# Altium PCB MB525.PCBDOC (part 2 of 3)
Units mil, origin at the board's own origin, x right, y up, seen from the top; angles counter-clockwise.
Board outline 4505 x 6805 mil, 4 copper layers (TopLayer, GND, VCC, BottomLayer); 281 components, 230 nets, 1107 pads, 580 vias.
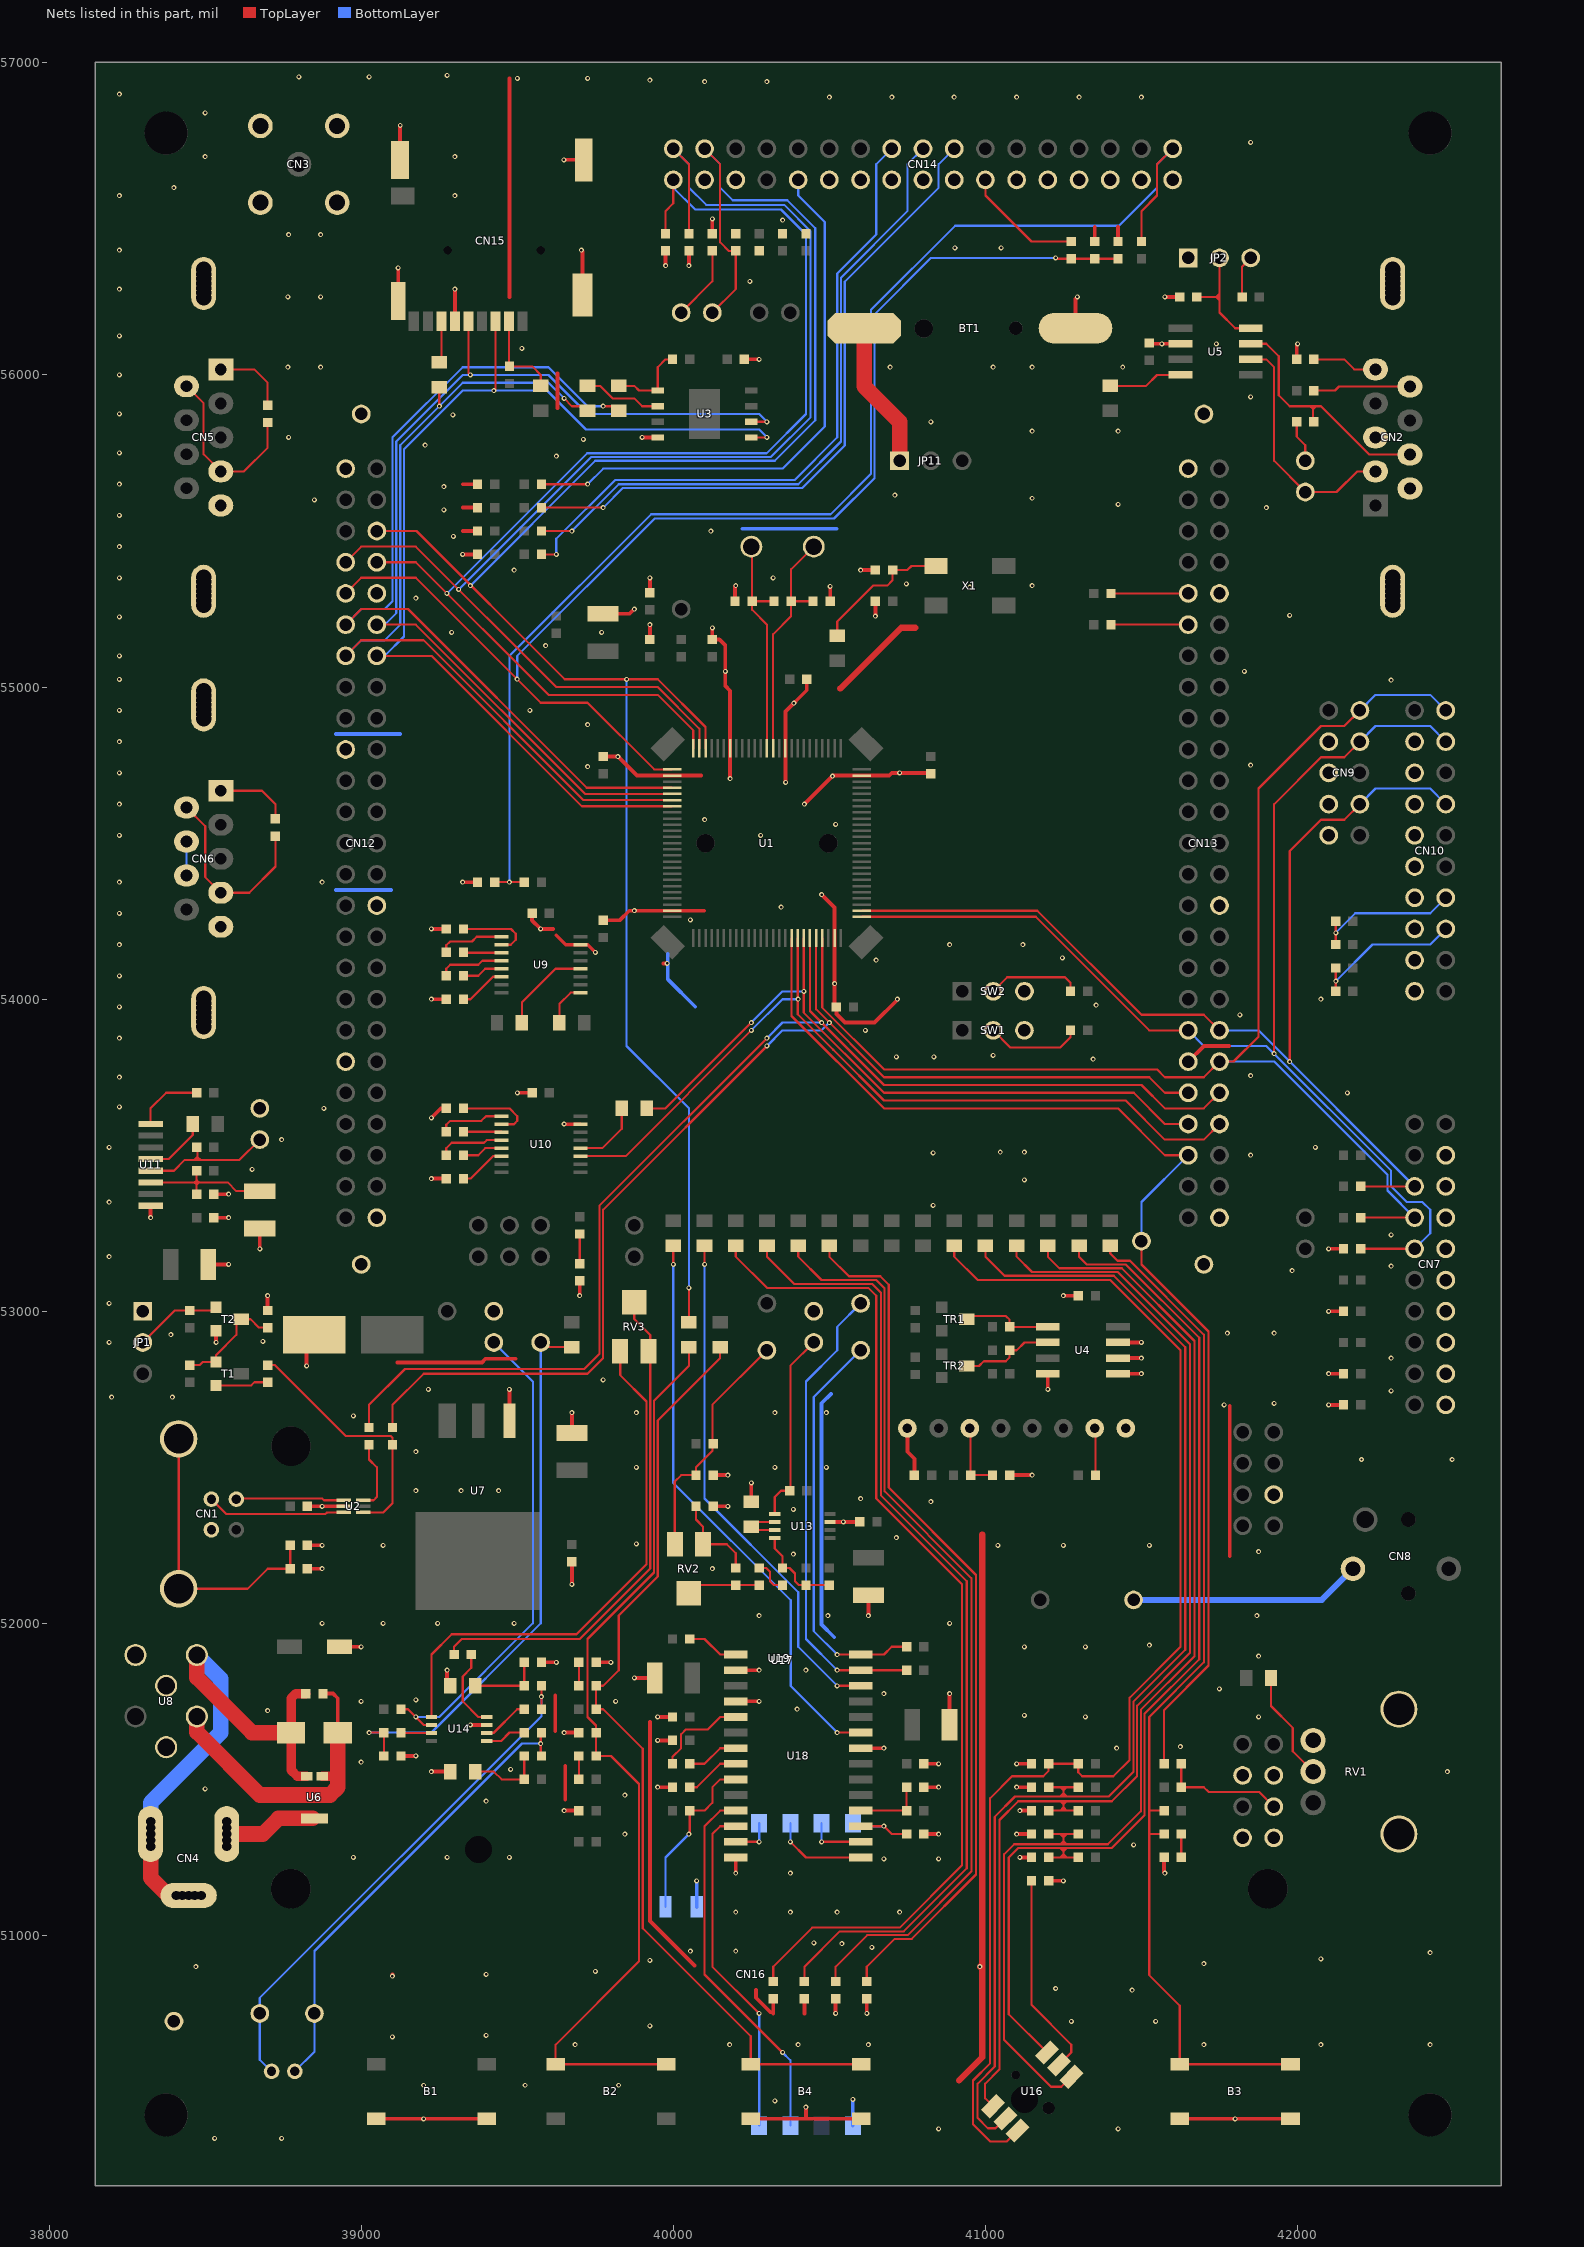
[diagram p4: the nets of this part, all layers, seen from the top]

## Via types
v1: diameter 16, hole 8, TopLayer to BottomLayer, 577 vias
v2: diameter 50, hole 28, TopLayer to BottomLayer, 3 vias

## Nets (pads, with @x,y where several pads share a name; then routed paths per layer and width w, separated by ;. In a path a pad name is that pad's centre, name@x,y a point inside that pad or via, vN(x,y) a via of type N, cw(c..) or ccw(c..) an arc to the next point about the centre after c; other vN are vias at no path point) (continued)
GND: B1.1 B1.4 B3.1 B3.4 B4.1 B4.4 BT1.2 C1.2 C2.2 C3.2 C4.2 C5.1 C6.1 C7.1 C8.1 C9.1 C10.1 C12.2 C13.2 C14.2 C15.2 C16.2 C17.2 C18.1 C19.1 C24.1 C25.1 C26.2 C27.2 C28.2 C29.2 C30.1 C33.1 C34.2 C35.2 C36.2 C37.2 C40.1 C41.1 C42.1 C43.1 C44.1 C48.1 C49.1 C50.1 C51.1 C52.1 C53.1 C54.2 C55.2 C56.2 C57.2 C58.2 C59.2 C60.2 C61.2 C63.2 C64.2 C65.2 C66.1 C67.2 C68.2 C69.2 C70.2 C71.1 C72.1 C73.1 C74.1 C75.1 C76.1 C77.2 C78.1 CN1.4 CN2.0 CN2.3 CN2.6 CN3.1 CN3.2 CN3.3 CN3.4 CN5.0 CN5.5 CN6.0 CN6.5 CN7.4 CN7.6 CN7.8 CN7.10 CN7.12 CN7.14 CN7.16 CN7.18 CN7.20 CN9.3 CN9.5 CN9.7 CN9.9 CN10.3 CN10.5 CN10.7 CN10.9 CN10.11 CN10.13 CN10.15 CN10.17 CN10.19 CN12.1 CN12.10 CN12.19 CN12.30 CN12.39 CN12.50 CN13.1 CN13.10 CN13.30 CN13.39 CN13.50 CN14.2 CN14.4 CN14.6 CN14.8 CN14.10 CN14.12 CN14.16 CN14.18 CN14.20 CN14.22 CN14.24 CN14.30 CN14.32 CN15.6 CN15.G1 CN15.G2 CN15.G3 CN15.G4 CN16.5 CN16.17 JP1.1 JP2.1 JP5.2 JP6.2 JP7.2 LD1.2 LD2.2 LD3.2 LD4.2 LD5.2 R3.1 R4.2 R14.2 R20.1 R35.1 R39.1 R46.1 R48.1 R49.1 R50.2 R84.1 R96.2 R102.1 R108.1 R109.1 R110.2 R111.2 R118.1 RV1.0 RV1.1 SW1.3 SW2.3 T2.1 TP3.1 TP12.1 TP13.1 TP14.1 TP15.1 U1.10 U1.19 U1.27 U1.49 U1.74 U1.99 U2.2 U3.4 U4.4 U4.5 U4.6 U4.7 U5.2 U7.1 U8.4 U8.5 U8.6 U9.15 U10.15 U11.8 U13.7 U14.7 U17.6 U17.11 U17.12 U17.15 U17.16 U18.2 U18.4 U18.14 U18.22 U19.1 U19.8 | length 16748.1
  TopLayer w12: v1(38325,53300) U11.8@38325,53338.19 ; C26.2@38510,53150 v1(38575,53150) ; C28.2@38527.5,53300 v1(38575,53300) ; C29.2@38527.5,53375 v1(38575,53375) ; v1(38535,52900) T2.1@38535,52937.5 ; v1(38675,53200) C27.2@38675,53265 ; R14.2@38700,53002.5 v1(38700,53050) ; v1(38825,52825) C14.2@38825,52900 ; R3.1@38827.5,52175 v1(38875,52175) ; C9.1@38827.5,52250 v1(38875,52250) ; C6.1@38827.5,52375 U2.2@38943.7,52375 ; C12.2@38930,51925 v1(39000,51925) ; B1.1@39047.83,50412.5 B1.4@39402.17,50412.5 ; v1(39100,50870) v1@39100,50875 ; 39115.04,52836 39386.58,52836 39398.08,52847.5 39495,52847.5 ; CN15.G4@39118.31,56236.61 v1(39118.31,56343.31) ; CN15.G2@39124.21,56689.37 39124.21,56799.21 v1(39125,56800) ; C54.2@39127.5,51575 v1(39175,51575) ; v1(39225,51525) C36.2@39285,51525 ; v1(39225,53425) C25.1@39272.5,53425 ; v1(39225,53620) 39255,53650 C19.1@39272.5,53650 ; v1(39225,54000) C24.1@39272.5,54000 ; v1(39225,54225) C18.1@39272.5,54225 ; C37.2@39275,51795 v1(39275,51850) ; v1(39300,56275) 39300.39,56274.61 CN15.6@39300.39,56171.65 ; v1(39325,54375) C48.1@39372.5,54375 ; v1(39325,55425) C53.1@39372.5,55425 ; 39325,55500 C52.1@39372.5,55500 ; 39325,55575 C50.1@39372.5,55575 ; 39325,55650 C51.1@39372.5,55650 ; v1(39350,51675) 39350.59,51674.41 U14.7@39402.17,51674.41 ; U7.1@39475,52648.82 v1(39475,52750) ; 39475,56250 39475,56950 ; v1(39500,53700) C16.2@39547.5,53700 ; C17.2@39547.5,54275 39547.5,54252.5 v1(39574.71,54225.29) ; v1@39575,54225 39615,54225 ; R39.1@39577.5,51875 v1(39625,51875) ; 39621.5,51655 39621.5,51769 ; 39625,54205 39655.59,54174.41 39725.59,54174.41 v1(39750,54150) ; 39629,55894.54 39629,56005 ; v1(39649.37,56689.37) CN15.G3@39712.79,56689.37 ; v1(39650,51400) C5.1@39697.5,51400 ; v1(39650,51650) R50.2@39697.5,51650 ; v1(39650,53600) 39650.59,53599.41 U10.15@39701.97,53599.41 ; 39653.5,51435 39653.5,51544 ; v1(39675,52125) C15.2@39675,52197.5 ; C13.2@39675,52610 v1(39675,52675) ; v1(39700,53050) LD5.2@39700,53097.5 ; v1(39705,56400) 39708.86,56396.14 CN15.G1@39708.86,56256.3 ; R49.1@39752.5,51875 v1(39800,51875) ; C58.2@39775,54252.5 39827.5,54252.5 39858.46,54283.46 40098.46,54283.46 ; C57.2@39775,54777.5 v1(39822.5,54777.5) 39883.46,54716.54 40088.46,54716.54 ; C55.2@39775,55235 39860,55235 v1(39875,55250) ; v1(39875,51825) C67.2@39940,51825 ; v1(39900,55800) U3.4@39950,55800 ; 39925,51685 39925,51045.96 40067.5,50903.46 ; C56.2@39925,55152.5 v1(39925,55200) ; C77.2@39925,55302.5 v1(39925,55350) ; v1(39950,51475) C64.2@39997.5,51475 ; v1(39950,51625) C63.2@39997.5,51625 ; v1(39950,51700) C69.2@39997.5,51700 ; 39968.31,54114.27 39979.27,54114.27 v1(39980,54115) ; v1(39975,56350) C71.1@39975,56397.5 ; v1(40050,56350) C74.1@40050,56397.5 ; v1(40125,55190) R84.1@40125,55152.5 40147.5,55152.5 40166.69,55133.31 40166.69,55003.31 40181.89,54988.11 v1(40181.89,54706.89) ; C73.1@40125,56452.5 v1(40125,56500) ; R35.1@40127.5,52375 v1(40175,52375) ; C33.1@40127.5,52475 v1(40175,52475) ; C4.2@40197.5,55275 40197.5,55322.5 v1(40200,55325) ; v1(40200,51200) U18.14@40200,51250 ; U18.4@40200,51750 v1(40275,51750) ; U18.2@40200,51850 v1(40275,51850) ; C7.1@40227.5,56050 v1(40275,56050) ; B4.1@40247.83,50412.5 B4.4@40607.5,50412.5 ; C35.2@40250,52390 v1(40250,52450) ; 40265,50825 40265,50800.33 40311.83,50753.5 ; 40320,50750 LD4.2@40320,50797.5 ; v1(40360,54695) 40359.06,54695.94 40359.06,54921.56 40427.5,54990 C61.2@40427.5,55025 ; 40420,50750 LD3.2@40420,50797.5 ; v1(40420,54625) 40511.54,54716.54 40691.54,54716.54 40700,54725 C59.2@40822.5,54725 ; 40425,50412.5 v1(40425,50450) ; v1(40475,54335) 40516.54,54293.46 C60.2@40516.54,53980.96 ; C3.2@40502.5,55275 v1(40502.5,55322.5) ; U13.7@40502.76,52325 C30.1@40597.5,52325 ; v1(40520,50750) LD2.2@40520,50797.5 ; C60.2@40522.5,53975 40522.5,53952.5 40550,53925 40645,53925 v1@40720,54000 ; U18.22@40600,51600 v1(40675,51600) ; v1(40600,55375) C1.2@40647.5,55375 ; v1(40620,50750) LD1.2@40620,50797.5 ; v1(40625,52025) C34.2@40625,52090 ; v1(40647.5,55227.5) C2.2@40647.5,55275 ; U19.1@40750,52625 40750,52550 40772.5,52527.5 C70.2@40772.5,52475 ; C66.1@40802.5,51325 v1(40850,51325) ; R96.2@40802.5,51475 v1(40850,51475) ; C65.2@40802.5,51550 v1(40850,51550) ; C68.2@40885,51675 v1(40885,51775) ; R108.1@41077.5,52475 v1(41150,52475) ; v1(41100,51325) C43.1@41147.5,51325 ; v1(41100,51475) C40.1@41147.5,51475 ; v1(41100,51550) C41.1@41147.5,51550 ; v1(41110,51250) C44.1@41147.5,51250 ; v1(41110,51400) C42.1@41147.5,51400 ; v1(41200,52750) U4.4@41200,52800 ; R46.1@41202.5,51175 v1(41250,51175) ; v1(41250,53050) C10.1@41297.5,53050 ; BT1.2@41288.58,56150 41288.58,56243.58 v1(41295,56250) ; R20.1@41350,56427.5 41350,56475 ; U4.5@41425,52800 v1(41500,52800) ; U4.6@41425,52850 v1(41500,52850) ; U4.7@41425,52900 v1(41500,52900) ; C49.1@41425,56427.5 41425,56475 ; C8.1@41527.5,56100 U5.2@41625,56100 ; R48.1@41572.5,51250 41572.5,51202.5 v1(41575,51200) ; v1(41575,56250) R4.2@41622.5,56250 ; B3.1@41622.83,50412.5 B3.4@41977.17,50412.5 ; CN13.39@41650,53800 41700,53850 41781.32,53850 ; 41782.5,52215 41782.5,52697.5 ; R118.1@41997.5,56050 v1@41997.5,56097.5 ; v1(42100,52700) R111.2@42147.5,52700 ; v1(42100,52800) R110.2@42147.5,52800 ; v1(42100,53000) R109.1@42147.5,53000 ; v1(42100,53200) R102.1@42147.5,53200
  TopLayer w20: 40535,54995 40730,55190 40775,55190 ; 40915,50535 40990,50610 40990,52285 ; v1(40982.5,50900) 40990,50907.5
  BottomLayer w12: 38918.68,54350 39095,54350 ; 38918.68,54850 39125,54850 ; 39982.5,54145 39982.5,54063.46 40070,53975.96 ; CN16.17@40075,51091.54 v1(40075,51175) ; 40221.9,55507.5 40523.42,55507.5 ; 40505,52735 40475,52705 40475,51995.96 40515.68,51955.28 ; CN16.5@40575,50390.75 v1(40575,50475) ; v1(40902.5,56407.5) v1@40905,56407.5
  other v1: 38530,50350 38745,50350 40850,50380 41425,50380 39200,50412.5 41800,50412.5 40325,50470 39200,50520 39525,50520 39825,50520 39685,50650 40180,50650 40400,50650 40625,50650 41700,50650 42075,50650 42425,50650 39100,50675 39400,50680 39925,50710 41275,50725 41545,50725 41470,50825 41225,50830 39400,50875 39750,50885 38470,50900 41700,50910 39925,50920 42075,50925 42425,50945 40055,50950 40200,50950 40636.15,50962.11 40539.67,50973.71 40450,50975.96 40200,51075 40375,51075 40525,51075 40725,51075 40375,51200 40675,51245 40850,51245 38975,51250 39275,51250 39475,51250 41475,51290 39845,51325 39400,51430 39845,51450 38500,51470 42480,51525 39478.5,51532.5 39000,51555 41420,51600 41625,51605 41320,51700 41875,51700 41125,51705 38700,51720 40396.5,51725 39000,51750 39815,51750 39175,51755 40675,51775 41750,51790 40425,51850 41875,51895 41125,51925 41320,51925 41525,51930 38875,52000 39070,52000 39245,52000 39490,52000 40885,52000 40275,52025 40495,52025 41870,52025 40125,52175 40385,52221.5 41875,52230 39070,52250 41040,52250 41250,52250 41525,52250 39881.5,52255 40715,52275 40545,52325 40385,52365 38875,52375 40825,52390 40600,52400 39175,52425 39320,52425 39440,52425 39881.5,52500 40325,52500 40490,52500 42205,52525 42495,52525 39175,52550 38975,52665 39881.5,52675 40325,52675 40490,52675 41765,52700 41925,52705 38200,52725 38395,52725 42300,52745 39215,52750 39775,52780 42300,52850 38192.5,52900 38685,52903.5 38390,52925 41775,52930 41925,52930 38192.5,53025 41982.5,53130 42300,53145 38192.5,53175 42300,53245 40832.5,53339 38192.5,53350 41125,53420.96 38650,53455 41850,53500 40832.5,53507.32 41047.5,53510 41125,53510 38192.5,53525 42057.5,53525 38745,53550 38880,53650 38225,53655 42160,53700 38225,53750 41850,53755 41345,53807.5 40715,53815 40835,53815 41025,53820 38225,53875 40615,53900 41815,53950 38225,53975 41355,53981 40717.5,54000 42075,54000 40516.54,54050 38225,54075 40650,54125 41246.54,54132.5 38225,54175 40885,54175 41120,54175 40054.39,54254.39 38225,54275 39875,54283.46 40345,54295 38225,54375 38875,54375 38225,54525 40280,54525 40520,54560 40100,54575 38225,54625 40510,54715 38225,54725 40725,54725 39725,54745 41850,54750 38225,54825 39725,54880 38225,54925 39540,54925 40385.93,54948.43 42300,55022.5 38225,55025 40166.69,55050 41830,55050 38225,55100 39590.83,55132.4 39290,55175 39770,55175 38225,55225 41975,55230 39175,55285 40950,55320 41150,55325 40746.5,55331 38225,55350 40320,55350 39490,55375 38225,55450 39295,55482.5 40120,55500 38225,55550 39265,55567.5 41900,55575 41425,55585 38850,55600 41150,55605 40710,55615 39265,55642.5 38225,55650 39625,55740 38225,55750 39205,55775 39712,55793.5 38767.5,55800 41150,55820 41425,55820 40825,55850 39293.25,55872.29 38225,55875 41850,55930 38225,56000 38765,56025 38870,56025 40695,56025 41025,56025 41150,56025 41440,56025 39515,56085 41565,56100 41740,56100 42000,56100 38225,56125 38765,56250 38870,56250 38225,56275 40245,56300 38225,56400 41050,56407.5 38767.5,56450 38870,56450 40350,56496.5 38225,56575 39300,56575 38400,56600 38500,56700 39300,56700 41850,56745 38500,56840 40500,56890 40700,56890 40900,56890 41100,56890 41300,56890 41500,56890 38225,56900 40100,56940 40300,56940 39925,56945 39500,56950 39725,56950 38800,56955 39025,56955 39275,56960
NetB2_2: B2.2 B2.3 C45.2 R50.1 R85.1 | length 2993.3
  TopLayer w7: B2.3@39977.17,50587.5 B2.2@39622.83,50587.5 39622.83,50650 39890,50917.17 39890,51485 39800,51575 C45.2@39752.5,51575 39752.5,51672.5 39725,51700 39725,51950 39938,52163 39938,52713 40050,52825 R85.1@40050,52885
NetB3_2: B3.2 B3.3 C46.2 R51.1 R78.1 | length 3332.5
  TopLayer w7: R78.1@41400,53210 41400,53185 41423,53162 41463,53162 41700,52925 41700,51875 41525,51700 41525,50872.83 41622.83,50775 B3.2@41622.83,50587.5 B3.3@41977.17,50587.5 ; 41525,51325 C46.2@41572.5,51325 ; 41525,51400 R51.1@41572.5,51400
NetB4_2: B4.2 B4.3 C47.2 R52.1 R62.1 | length 3048
  TopLayer w7: R62.1@40150,52885 40150,52850 39950,52650 39950,52150 39825,52025 39825,51850 39775,51800 C47.2@39752.5,51800 R52.1@39752.5,51725 39775,51725 39902,51598 39902,51023 40247.83,50677.17 B4.2@40247.83,50587.5 B4.3@40602.17,50587.5
NetBT1_1: BT1.1 JP11.1 | length 452
  TopLayer w50: BT1.1@40611.42,56140 40611.42,55963.58 40725,55850 JP11.1@40725,55735
NetC1_1: C1.1 R15.1 X1.4 | length 454.5
  TopLayer w7: R15.1@40525,55165 40525,55210 40640,55325 40685,55325 40702.5,55342.5 C1.1@40702.5,55375 40750,55375 40762.99,55387.99 X1.4@40841.73,55387.99
NetC9_2: C9.2 CN1.0 R3.2 | length 939
  TopLayer w7: CN1.0@38415,52591 CN1.0@38415,52111 38636,52111 38700,52175 R3.2@38772.5,52175 C9.2@38772.5,52250
NetC18_2: C18.2 U9.2 | length 245.2
  TopLayer w7: C18.2@39327.5,54225 39480,54225 39495,54210 39495,54190 39479.41,54174.41 U9.2@39450,54174.41
NetC19_2: C19.2 U10.2 | length 252.2
  TopLayer w7: C19.2@39327.5,53650 39475,53650 39500,53625 39500,53610 39489.41,53599.41 U10.2@39450,53599.41
NetC22_1: C22.1 U9.1 | length 211.4
  TopLayer w7: C22.1@39272.5,54150 39272.5,54172.5 39285,54185 39355,54185 39370,54200 U9.1@39450,54200
NetC22_2: C22.2 U9.3 | length 121.3
  TopLayer w7: C22.2@39328.68,54148.82 U9.3@39450,54148.82
NetC23_1: C23.1 U10.1 | length 211.4
  TopLayer w7: C23.1@39272.5,53575 39272.5,53597.5 39285,53610 39385,53610 39400,53625 U10.1@39450,53625
NetC23_2: C23.2 U10.3 | length 121.3
  TopLayer w7: C23.2@39327.5,53575 U10.3@39448.82,53575
NetC24_2: C24.2 U9.6 | length 152.3
  TopLayer w7: C24.2@39327.5,54000 39350,54000 39422.05,54072.05 U9.6@39450,54072.05
NetC25_2: C25.2 U10.6 | length 152.3
  TopLayer w7: C25.2@39327.5,53425 39350,53425 39422.05,53497.05 U10.6@39450,53497.05
NetC32_2: C32.2 R33.1 | length 115.4
  TopLayer w7: C32.2@40275,52177.5 40297.5,52177.5 40310,52165 40310,52135 40322.5,52122.5 R33.1@40350,52122.5
NetC36_1: C36.1 R36.1 R37.1 | length 242.9
  TopLayer w7: C36.1@39365,51525 39425,51525 39450,51500 R36.1@39522.5,51500 R37.1@39522.5,51575
NetC37_1: C37.1 R38.1 R39.2 | length 232.5
  TopLayer w7: C37.1@39365,51800 R38.1@39522.5,51800 R39.2@39522.5,51875
NetC38_2: C38.2 U14.5 | length 131.4
  TopLayer w7: U14.5@39402.17,51623.23 39448.23,51623.23 39475,51650 C38.2@39522.5,51650
NetC39_2: C39.2 U14.6 | length 151.9
  TopLayer w7: U14.6@39402.17,51648.82 39423.82,51648.82 39500,51725 C39.2@39522.5,51725
NetC45_1: C45.1 R47.2 | length 75
  TopLayer w7: R47.2@39697.5,51500 C45.1@39697.5,51575
NetC46_1: C46.1 R48.2 | length 75
  TopLayer w7: R48.2@41627.5,51250 C46.1@41627.5,51325
NetC47_1: C47.1 R49.2 | length 75
  TopLayer w7: C47.1@39697.5,51800 R49.2@39697.5,51875
NetC62_1: C62.1 U18.7 | length 168.2
  TopLayer w7: C62.1@40052.5,51550 40100,51550 40150,51600 U18.7@40200,51600
NetC66_2: C66.2 CN16.1 U18.17 | length 252.9
  TopLayer w7: U18.17@40600,51350 v1(40675,51350) 40700,51325 C66.2@40747.5,51325
  BottomLayer w7: CN16.1@40580,51350 v1(40675,51350)
NetC73_2: C73.2 JP12.2 | length 238.9
  TopLayer w7: JP12.2@40025,56200 40125,56300 C73.2@40125,56397.5
NetCN1_2: CN1.2 U2.1 | length 346.7
  TopLayer w7: CN1.2@38600,52398 38602,52400 38875,52400 38880.32,52394.68 U2.1@38943.7,52394.68
NetCN1_3: CN1.3 U2.3 | length 445.8
  TopLayer w7: CN1.3@38520,52398 38568,52350 38885,52350 38890.32,52355.32 U2.3@38943.7,52355.32
NetCN4_1: CN4.1 U6.1 | length 296.6
  TopLayer w50: CN4.1@38569.1,51325 38685,51325 38735,51375 U6.1@38845,51375
NetCN4_3: C11.2 CN4.2 CN4.3 U6.2 U8.2 Z1.1 | length 1812.5
  TopLayer w30: C11.2@38822.5,51775 38790,51775 38775.2,51760.2 38775.2,51529.8 38795,51510 U6.2@38825,51510
  TopLayer w50: CN4.3@38325,51325 38325,51185 38381.85,51128.15 CN4.2@38467.05,51128.15 ; U8.2@38473.43,51898.43 38473.43,51826.57 38650,51650 Z1.1@38775.2,51650
  BottomLayer w50: CN4.3@38325,51305 38325,51425 38550,51650 38550,51821.85 U8.2@38473.43,51898.43
NetCN6_7: CN6.7 CN6.8 | length 109
  BottomLayer w7: CN6.8@38440,54396 CN6.7@38440,54505
NetCN8_10: CN8.10 U12.1 | length 744
  BottomLayer w20: U12.1@41475,52075 42077.56,52075 CN8.10@42177.56,52175
NetCN10_14: CN10.14 R124.1 R129.1 | length 474.1
  TopLayer w7: R124.1@42122.5,54175 R129.1@42122.5,54250
  BottomLayer w7: v1(42122.5,54212.5) 42185,54275 42425,54275 CN10.14@42475,54325
NetCN10_16: CN10.16 R125.1 R130.1 | length 501.9
  TopLayer w7: R125.1@42122.5,54025 R130.1@42122.5,54100
  BottomLayer w7: v1(42122.5,54057.5) 42240,54175 42425,54175 CN10.16@42475,54225 CN10.16@42470,54225
NetCN14_14: CN14.14 R54.1 | length 386.1
  TopLayer w7: CN14.14@41000,56625 41000,56575 41147.5,56427.5 R54.1@41275,56427.5
NetCN14_26: CN14.26 R56.1 | length 1809.3
  TopLayer w7: R56.1@39577.5,55650 v1(39725,55650)
  BottomLayer w7: v1(39725,55650) 39775,55700 40350,55700 40485,55835 40485,56490 40400,56575 CN14.26@40400,56625
NetCN16_2: CN16.2 U18.16 | length 184.3
  TopLayer w7: v1(40475,51300) U18.16@40600,51300
  BottomLayer w7: v1(40475,51300) CN16.2@40475,51359.25
NetCN16_3: CN16.3 U18.15 | length 305
  TopLayer w7: v1(40375,51300) 40425,51250 U18.15@40600,51250
  BottomLayer w7: v1(40375,51300) CN16.3@40375,51359.25
NetJP2_3: JP2.3 R91.1 | length 136.4
  TopLayer w7: R91.1@41822.5,56250 41822.5,56347.5 JP2.3@41850,56375
NetJP5_1: JP5.1 R23.1 U11.5 | length 457
  TopLayer w7: U11.5@38325,53450.39 38400,53450.39 38434.61,53485 38610,53485 JP5.1@38675,53550 ; 38465,53485 38475,53495 38485,53485 ; 38475,53485 R23.1@38475,53522.5
NetJP6_1: JP6.1 R29.1 U13.1 | length 617.9
  TopLayer w7: U13.1@40325,52350 40325,52405 40345,52425 R29.1@40372.5,52425 40375,52427.5 40375,52825 JP6.1@40450,52900
NetLD1_1: LD1.1 R8.1 | length 2788
  TopLayer w7: R8.1@40500,53210 40500,53175 40563,53112 40663,53112 40690,53085 40690,52435 40970,52155 40970,51195 40764,50989 40709,50989 40620,50900 LD1.1@40620,50852.5
NetLD2_1: LD2.1 R7.1 | length 2946.2
  TopLayer w7: R7.1@40400,53210 40400,53175 40475,53100 40650,53100 40677,53073 40677,52423 40955,52145 40955,51205 40751,51001 40621,51001 40520,50900 LD2.1@40520,50852.5
NetLD3_1: LD3.1 R6.1 | length 3104.5
  TopLayer w7: R6.1@40300,53210 40300,53175 40388,53087 40638,53087 40665,53060 40665,52410 40940,52135 40940,51215 40738,51013 40533,51013 40420,50900 LD3.1@40420,50852.5
NetLD4_1: LD4.1 R5.1 | length 3262.8
  TopLayer w7: R5.1@40200,53210 40200,53175 40300,53075 40625,53075 40650,53050 40650,52400 40925,52125 40925,51225 40725,51025 40445,51025 40320,50900 LD4.1@40320,50852.5
NetR4_1: JP2.2 R4.1 U5.8 | length 396.5
  TopLayer w7: R4.1@41677.5,56250 41750,56250 ; 41750,56240 41740,56250 41750,56260 ; JP2.2@41750,56375 41750,56200 41800,56150 U5.8@41850,56150
NetR11_1: R11.1 R63.1 U3.1 | length 264.1
  TopLayer w7: R63.1@39825,55965 39875,55965 39890,55950 U3.1@39950,55950 39950,56025 39975,56050 R11.1@39997.5,56050
NetR12_1: R12.1 T1.1 | length 169.1
  TopLayer w7: T1.1@38535,52762.5 38647.5,52762.5 38657.5,52772.5 R12.1@38700,52772.5
NetR13_2: R13.2 R14.1 T1.2 T2.3 | length 349.7
  TopLayer w7: R13.2@38450,52827.5 38482.5,52827.5 38492.5,52837.5 T1.2@38535,52837.5 38535,52860 38600,52925 T2.3@38600,52975 ; T2.3@38615,52974.5 38645.5,52974.5 38672.5,52947.5 R14.1@38700,52947.5
NetR19_2: JP3.1 R19.2 | length 136.4
  TopLayer w7: R19.2@41997.5,55850 41997.5,55802.5 42025,55775 JP3.1@42025,55725
NetR21_2: CN2.9 R21.2 | length 312.9
  TopLayer w7: R21.2@42052.5,55950 42120,55950 42133,55963 CN2.9@42360,55963
NetR22_1: LD5.1 R22.1 | length 95
  TopLayer w7: LD5.1@39700,53152.5 R22.1@39700,53247.5
NetR24_1: CN5.4 CN5.6 R24.1 | length 580.5
  TopLayer w7: CN5.6@38440,55964 38495,55909 38495,55746 CN5.4@38550,55691 38624,55691 38700,55767 R24.1@38700,55847.5
NetR24_2: CN5.1 R24.2 | length 240.3
  TopLayer w7: CN5.1@38550,56018 38657,56018 38700,55975 R24.2@38700,55902.5
NetR25_1: CN6.4 CN6.6 R25.1 | length 625.9
  TopLayer w7: CN6.6@38440,54614 38500,54554 38500,54391 CN6.4@38550,54341 38641,54341 38725,54425 R25.1@38725,54522.5
NetR25_2: CN6.1 R25.2 | length 240.3
  TopLayer w7: CN6.1@38550,54668 38682,54668 38725,54625 R25.2@38725,54577.5
NetR27_2: R27.2 U11.1 | length 218.2
  TopLayer w7: U11.1@38325,53600 38325,53650 38375,53700 R27.2@38472.5,53700
NetR28_2: C27.1 C29.1 R28.2 U11.6 | length 479.6
  TopLayer w7: U11.6@38325,53412.99 38572.01,53412.99 38600,53385 C27.1@38675,53385 ; C29.1@38472.5,53375 R28.2@38472.5,53450 ; 38465,53412.5 38465,53412.99 38465.49,53412.99 38472.5,53420 38472.99,53420 38480,53412.99 38472.5,53405.49 38472.5,53405 38465,53412.5
NetR32_2: C33.2 R32.2 RV2.1 TP4.1 | length 771.4
  TopLayer w7: RV2.1@40004.72,52253.74 40004.72,52454.72 40025,52475 C33.2@40072.5,52475 40072.5,52500 40125,52552.5 40125,52700 TP4.1@40300,52875
NetR33_2: C31.1 R31.1 R33.2 U13.4 | length 293.5
  TopLayer w7: U13.4@40325,52273.23 40325,52240 40350,52215 R33.2@40350,52177.5 40372.5,52177.5 40390,52160 40390,52135 40402.5,52122.5 R31.1@40500,52122.5
NetR35_2: R34.1 R35.2 RV2.3 | length 294.8
  TopLayer w7: R35.2@40072.5,52375 40072.5,52332.5 40095.28,52309.72 RV2.3@40095.28,52253.74 40171.26,52253.74 40200,52225 R34.1@40200,52177.5
NetR40_1: R40.1 RV3.1 RV3.2 | length 1631.3
  TopLayer w7: R40.1@39297.5,51900 39297.5,51925 39322.5,51950 39700,51950 39926,52176 39926,52924 39875,52975 RV3.2@39875,53028.74
NetR46_2: R46.2 U16.5 | length 657.5
  TopLayer w7: R46.2@41147.5,51175 41147.5,50777.5 41275,50650 41275,50625 U16.5@41236.3,50586.3
NetR55_2: CN14.15 R55.2 | length 2150.3
  TopLayer w7: R55.2@39577.5,55575 v1(39775,55575)
  BottomLayer w7: v1(39775,55575) 39838,55638 40413,55638 40549,55774 40549,56299 40850,56600 40850,56675 CN14.15@40900,56725
NetR57_2: CN14.17 R57.2 | length 2125.3
  TopLayer w7: R57.2@39577.5,55500 v1(39675,55500)
  BottomLayer w7: v1(39675,55500) 39825,55650 40400,55650 40537,55787 40537,56312 40750,56525 40750,56675 CN14.17@40800,56725
NetR58_2: CN14.19 R58.2 | length 2129.6
  TopLayer w7: R58.2@39577.5,55425 v1(39625,55425)
  BottomLayer w7: v1(39625,55425) 39625,55475 39813,55663 40388,55663 40525,55800 40525,56325 40650,56450 40650,56675 CN14.19@40700,56725
NetR59_2: CN13.9 R59.2 | length 247.5
  TopLayer w7: R59.2@41402.5,55300 CN13.9@41650,55300
NetR60_1: CN13.11 R60.1 | length 247.5
  TopLayer w7: R60.1@41402.5,55200 CN13.11@41650,55200
NetR61_1: C48.2 CN14.1 R53.1 R61.1 | length 4308.5
  TopLayer w7: C48.2@39427.5,54375 R53.1@39522.5,54375 ; R61.1@41500,56427.5 41500,56525 41550,56575 41550,56675 CN14.1@41600,56725
  BottomLayer w7: v1(39475,54375) 39475,55100 39929,55554 40504,55554 40633,55683 40633,56208 40903,56478 41428,56478 41550,56600 41550,56675 CN14.1@41600,56725
NetR64_1: R64.1 U11.4 | length 202
  TopLayer w7: U11.4@38325,53487.8 38382.8,53487.8 38460,53565 R64.1@38460,53600
NetR65_2: R65.2 U3.2 | length 251.9
  TopLayer w7: R65.2@39725,55965 39765,55965 39805,55925 39875,55925 39900,55900 U3.2@39950,55900
NetR67_2: R66.1 R67.2 U17.14 | length 397.2
  TopLayer w7: R67.2@41627.5,51550 R66.1@41627.5,51475 41700,51475 41715,51460 41876.65,51460 U17.14@41923.94,51412.72
NetR72_1: C40.2 R41.2 R72.1 U16.2 | length 4013.3
  TopLayer w7: R72.1@41000,53210 41000,53175 41061,53114 41411,53114 41640,52885 41640,51915 41474,51749 41474,51524 41395,51445 41095,51445 41030,51380 41030,50580 40975,50525 40975,50415 41007.9,50382.1 41032.1,50382.1 41055,50405 U16.2@41063.7,50413.7 ; C40.2@41202.5,51475 R41.2@41297.5,51475 ; 41240,51445 41250,51455 41260,51445 ; 41240,51475 41250,51465 41260,51475 ; 41250,51445 41250,51475
NetR73_1: C41.2 R42.1 R73.1 U16.3 | length 4072.4
  TopLayer w7: R73.1@40900,53210 40900,53175 40975,53100 41400,53100 41625,52875 41625,51925 41462,51762 41462,51562 41410,51510 41310,51510 41297.5,51522.5 R42.1@41297.5,51550 C41.2@41202.5,51550 41202.5,51527.5 41185,51510 41085,51510 41015,51440 41015,50590 40960,50535 40960,50395 41015,50340 41067.95,50340 U16.3@41102.67,50374.73
NetR74_1: C42.2 R43.1 R74.1 U16.1 | length 3788
  TopLayer w7: U16.1@41024.73,50452.67 40999,50478.4 40999,50525 41045,50571 41045,51370 41105,51430 41405,51430 41486,51511 41486,51736 41655,51905 41655,52895 41424,53126 41149,53126 41100,53175 R74.1@41100,53210 ; C42.2@41202.5,51400 R43.1@41297.5,51400 ; 41240,51400 41250,51410 41260,51400 ; 41240,51430 41250,51420 41260,51430 ; 41250,51400 41250,51430
NetR75_1: C43.2 R44.1 R75.1 U16.4 | length 3763.1
  TopLayer w7: R75.1@41200,53210 41200,53175 41237,53138 41437,53138 41670,52905 41670,51895 41498,51723 41498,51398 41392.24,51292.24 41092.24,51292.24 41060,51260 41060,50665 41210,50515 41242.95,50515 U16.4@41275.27,50547.33 ; C43.2@41202.5,51325 R44.1@41297.5,51325 ; 41240,51292.24 41250,51302.24 ; 41240,51325 41250,51315 41260,51325 ; 41250,51292.24 41250,51325 ; 41250,51305 41250,51302.24 ; 41260,51292.24 41250,51302.24
NetR76_1: C44.2 R45.1 R76.1 U16.6 | length 3478.1
  TopLayer w7: U16.6@41197.33,50625.27 41075,50747.6 41075,51250 41105,51280 41405,51280 41510,51385 41510,51710 41685,51885 41685,52915 41450,53150 41325,53150 41300,53175 R76.1@41300,53210 ; C44.2@41202.5,51250 R45.1@41297.5,51250 ; 41240,51250 41250,51260 41260,51250 ; 41240,51280 41250,51270 41260,51280 ; 41250,51250 41250,51280
NetR80_2: R80.2 RV1.2 | length 355.9
  TopLayer w7: R80.2@41915,51825 41915,51735 41985,51665 41985,51590 RV1.2@42050,51525
NetR81_1: CN15.2 R81.1 R98.1 | length 289.2
  TopLayer w7: R98.1@39473.62,56028.88 CN15.2@39473.62,56171.65 ; R98.1@39475,56027.5 39547.5,56027.5 39575,56000 R81.1@39575,55965
NetR82_2: CN15.7 R82.2 | length 124.6
  TopLayer w7: R82.2@39257.09,56047.09 CN15.7@39257.09,56171.65
NetR86_2: R86.2 SW1.2 | length 306.2
  TopLayer w7: SW1.2@41025,53900 41080,53845 41240,53845 41272.5,53877.5 R86.2@41272.5,53900
NetR87_2: R87.2 SW2.2 | length 300.7
  TopLayer w7: SW2.2@41025.14,54025.14 41070,54070 41255,54070 41272.5,54052.5 R87.2@41272.5,54025
NetR97_2: R97.2 U18.1 | length 168.2
  TopLayer w7: R97.2@40052.5,51950 40100,51950 40150,51900 U18.1@40200,51900
NetR106_2: R106.2 U19.7 | length 147.5
  TopLayer w7: R106.2@41352.5,52475 U19.7@41352.5,52622.5
NetR107_1: R107.1 R108.2 U19.3 | length 217.5
  TopLayer w7: U19.3@40952.5,52622.5 R107.1@40952.5,52475 R108.2@41022.5,52475
NetR116_1: R116.1 U5.4 | length 239.5
  TopLayer w7: R116.1@41400,55965 41515,55965 41550,56000 U5.4@41625,56000
NetR118_2: CN2.5 R118.2 | length 210.8
  TopLayer w7: R118.2@42052.5,56050 42150,56050 42182,56018 CN2.5@42250,56018
NetRV2_2: C32.1 R34.2 RV2.2 | length 227.5
  TopLayer w7: RV2.2@40047.5,52122.5 C32.1@40275,52122.5
NetRV3_3: RV3.3 U14.1 | length 1725.9
  TopLayer w7: U14.1@39225,51700 39225,51900 39290,51965 39690,51965 39914,52189 39914,52711 39829.72,52795.28 RV3.3@39829.72,52871.26
NetT2_2: JP1.2 R18.1 T2.2 | length 280
  TopLayer w7: JP1.2@38300,52900 38402.5,53002.5 T2.2@38537.5,53002.5
NetTP6_1: C54.1 R71.2 R119.1 TP6.1 | length 1823.7
  TopLayer w7: v1(39025,51650) R119.1@39072.5,51650 C54.1@39072.5,51575 ; TP6.1@39575,52900 39590,52885 R71.2@39675,52885
  BottomLayer w7: v1(39025,51650) 39225,51650 39575,52000 TP6.1@39575,52900
NetTR1_3: R17.1 TR1.3 U4.1 | length 287.7
  TopLayer w7: TR1.3@40940,52985 41065,52985 41077.5,52972.5 R17.1@41077.5,52950 U4.1@41200,52950
NetTR2_3: R16.1 TR2.3 U4.2 | length 304.5
  TopLayer w7: TR2.3@40940,52824.5 40979.5,52824.5 40995,52840 41065,52840 41077.5,52852.5 R16.1@41077.5,52875 41100,52875 41125,52900 U4.2@41200,52900
NetU2_4: R10.1 R12.2 U2.4 | length 812.3
  TopLayer w7: R12.2@38700,52827.5 38722.5,52827.5 38950,52600 39095,52600 39100,52595 39100,52385 39070.32,52355.32 U2.4@39006.3,52355.32
NetU2_6: R9.1 U2.6 | length 225.8
  TopLayer w7: U2.6@39006.3,52394.68 39039.68,52394.68 39050,52405 39050,52500 39025,52525 R9.1@39025,52572.5
NetU5_6: CN2.2 JP3.2 U5.6 | length 779.1
  TopLayer w7: U5.6@41850,56050 41900,56050 41925,56025 41925,55725 JP3.2@42025,55625 42125,55625 42191,55691 CN2.2@42250,55691
NetU5_7: CN2.7 R19.1 U5.7 | length 806.1
  TopLayer w7: U5.7@41850,56100 41900,56100 41940,56060 41940,55935 41975,55900 42075,55900 42230,55745 CN2.7@42360,55745 ; 42040,55900 42050,55890 42060,55900 ; R19.1@42050,55852.5 42050,55900
NetU6_3: C11.1 U6.3 U8.1 Z1.2 | length 1008.6
  TopLayer w7: U8.1@38473.43,51676.57 U8.1@38473.43,51701.57
  TopLayer w12: C11.1@38877.5,51775 38909.61,51775 38924.8,51759.8 Z1.2@38924.8,51650
  TopLayer w30: U6.3@38875,51510 38925,51510
  TopLayer w50: U8.1@38473.43,51701.57 38473.43,51651.57 38675,51450 38900,51450 38925,51475 Z1.2@38925,51649.8
NetU9_4: C20.1 U9.4 | length 210.7
  TopLayer w7: C20.1@39272.5,54075 39272.5,54097.5 39285,54110 39375,54110 39388.23,54123.23 U9.4@39450,54123.23
NetU9_5: C20.2 U9.5 | length 131.9
  TopLayer w7: C20.2@39327.5,54075 39375,54075 39397.64,54097.64 U9.5@39450,54097.64
NetU9_9: R79.1 U9.9 | length 141.8
  TopLayer w7: R79.1@39635,53925 39635,53985 39670.87,54020.87 U9.9@39701.97,54020.87
NetU9_12: R77.1 U9.12 | length 296.6
  TopLayer w7: R77.1@39515,53925 39515,53990 39622.64,54097.64 U9.12@39701.97,54097.64
NetU10_4: C21.1 U10.4 | length 210.7
  TopLayer w7: C21.1@39272.5,53500 39272.5,53522.5 39290,53540 39393.54,53540 39401.77,53548.23 U10.4@39450,53548.23
NetU10_5: C21.2 U10.5 | length 131.9
  TopLayer w7: C21.2@39327.5,53500 39375,53500 39397.64,53522.64 U10.5@39450,53522.64
NetU10_12: R70.1 U10.12 | length 223.9
  TopLayer w7: U10.12@39701.97,53522.64 39772.64,53522.64 39835,53585 R70.1@39835,53650
NetU13_2: C35.1 U13.2 U13.3 | length 133.2
  TopLayer w7: C35.1@40255.59,52324.41 U13.2@40325,52324.41 ; C35.1@40261.18,52298.82 U13.3@40325,52298.82
NetU14_2: JP7.1 R30.2 U14.2 | length 1569.5
  TopLayer w7: R30.2@39127.5,51725 39150,51725 39200.59,51674.41 U14.2@39225,51674.41
  BottomLayer w7: v1(39175,51700) 39250,51700 39550,52000 39550,52775 JP7.1@39425,52900
NetU14_3: R119.2 U14.3 | length 96.3
  TopLayer w7: R119.2@39128.68,51648.82 U14.3@39225,51648.82
NetU14_8: R40.2 U14.8 | length 259.3
  TopLayer w7: R40.2@39352.5,51900 39352.5,51857.5 39325,51830 39325,51750 39375,51700 U14.8@39402.17,51700
NetU15_1: C39.1 R38.2 TP7.1 U15.1 | length 1665
  TopLayer w7: C39.1@39577.5,51725 R38.2@39577.5,51800
  BottomLayer w7: U15.1@38712.6,50564.37 38675,50601.97 38675,50800 39577.5,51702.5 v1(39577.5,51765)
NetU15_2: C38.1 R37.2 TP5.1 U15.2 | length 1482
  TopLayer w7: R37.2@39575,51577.5 C38.1@39575,51647.5
  BottomLayer w7: U15.2@38787.4,50564.37 38850,50626.97 38850,50950 39515,51615 v1(39575,51615)
NetU18_5: C62.2 U18.5 | length 304.2
  TopLayer w7: C62.2@39997.5,51550 39997.5,51572.5 40025,51600 40025,51645 40040,51660 40110,51660 40150,51700 U18.5@40200,51700
NetU18_8: C64.1 U18.8 | length 178.6
  TopLayer w7: C64.1@40052.5,51475 40075,51475 40150,51550 U18.8@40200,51550
NetU18_9: CN16.18 R100.2 U18.9 | length 558.8
  TopLayer w7: v1(40050,51325) 40052.5,51327.5 R100.2@40052.5,51400 40100,51400 40125,51425 40125,51475 40150,51500 U18.9@40200,51500
  BottomLayer w7: CN16.18@39975,51091.54 39975,51250 v1(40050,51325)
NetU18_11: CN16.7 U18.11 | length 1193.9
  TopLayer w7: U18.11@40200,51400 40150,51400 40100,51350 40100,50875 v1(40350,50625)
  BottomLayer w7: v1(40350,50625) 40375,50600 CN16.7@40375,50390.75
NetU18_12: CN16.8 U18.12 | length 1081.7
  TopLayer w7: U18.12@40200,51350 40150,51350 40125,51325 40125,50900 v1(40275,50750)
  BottomLayer w7: CN16.8@40275,50390.75 v1(40275,50750)
NetU18_13: CN16.4 U18.13 | length 134.3
  TopLayer w7: U18.13@40200,51300 v1(40275,51300)
  BottomLayer w7: v1(40275,51300) CN16.4@40275,51359.25
NetU18_18: R95.2 R96.1 U18.18 | length 222.5
  TopLayer w7: U18.18@40600,51400 R95.2@40747.5,51400 R96.1@40747.5,51475
NetU18_23: R117.2 U18.23 | length 1852.5
  TopLayer w7: v1(40000,53150) R117.2@40000,53210 ; v1(40525,51650) U18.23@40600,51650
  BottomLayer w7: v1(40000,53150) 40000,52450 40376,52074 40376,51799 v1(40525,51650)
NetU18_26: R115.1 U18.26 | length 1661
  TopLayer w7: v1(40100,53150) R115.1@40100,53210 ; v1(40525,51800) U18.26@40600,51800
  BottomLayer w7: v1(40100,53150) 40100,52400 40400,52100 40400,51925 v1(40525,51800)
NetU18_27: R99.2 TP10.1 U18.27 | length 1511.4
  TopLayer w7: v1(40525,51850) R99.2@40747.5,51850
  BottomLayer w7: v1(40525,51850) 40425,51950 40425,52775 40525,52875 40525,52950 TP10.1@40600,53025
NetU18_28: R94.2 TP9.1 U18.28 | length 1301.1
  TopLayer w7: v1(40525,51900) 40675,51900 40700,51925 R94.2@40747.5,51925
  BottomLayer w7: v1(40525,51900) 40450,51975 40450,52725 TP9.1@40600,52875
OSC_IN: C3.1 R1.2 U1.12 X2.2 | length 769.8
  TopLayer w7: U1.12@40319.69,54804.13 40319.69,55169.69 40377.5,55227.5 40377.5,55377.5 X2.2@40450,55450 ; R1.2@40377.5,55275 C3.1@40447.5,55275
OSC_OUT: C4.1 R1.1 U1.13 X2.1 | length 736.6
  TopLayer w7: X2.1@40250,55450 40252.5,55447.5 40252.5,55247.5 40300,55200 U1.13@40300,54804.13 ; C4.1@40252.5,55275 R1.1@40322.5,55275
PA0: C78.2 CN12.6 CN14.31 JP12.1 R85.2 U1.23 | length 6578.7
  TopLayer w7: CN12.6@39050,55500 39177.28,55500 39652.28,55025 39950,55025 40103.15,54871.85 U1.23@40103.15,54804.13 ; R85.2@40050,52965 v1(40050,53075) ; CN14.31@40100,56725 40150,56675 40150,56425 40177.5,56397.5 C78.2@40200,56397.5 40200,56275 JP12.1@40125,56200
  BottomLayer w7: v1(39350,55325) 39750,55725 40325,55725 40455,55855 40455,56470 40365,56560 40190,56560 40150,56600 40150,56675 CN14.31@40100,56725 ; v1(39850,55025) 39850,53850 40050,53650 v1(40050,53075)
PA1: C74.2 CN12.7 CN14.33 U1.24 | length 4296.9
  TopLayer w7: CN12.7@38950,55400 39000,55450 39175,55450 39625,55000 39950,55000 40083.46,54866.54 U1.24@40083.46,54804.13 ; CN14.33@40000,56725 40050,56675 C74.2@40050,56452.5
  BottomLayer w7: v1(39311.93,55313.07) 39313.07,55313.07 39737,55737 40312,55737 40440,55865 40440,56460 40355,56545 40105,56545 40050,56600 40050,56675 CN14.33@40000,56725
PA2: C71.2 CN12.8 CN14.34 U1.25 | length 3952.4
  TopLayer w7: CN12.8@39050,55400 39175,55400 39600,54975 39950,54975 40063.78,54861.22 U1.25@40063.78,54804.13 ; C71.2@39975,56452.5 39975,56525 40000,56550 CN14.34@40000,56625
  BottomLayer w7: v1(39274.65,55300.35) 39275.35,55300.35 39724,55749 40299,55749 40425,55875 40425,56450 40345,56530 40070,56530 40000,56600 CN14.34@40000,56625
PA3: C49.2 CN12.9 R20.2 R54.2 U1.26 | length 4157.2
  TopLayer w7: CN12.9@38950,55300 39000,55350 39175,55350 39575,54950 39725,54950 39938.78,54736.22 U1.26@39995.87,54736.22 ; v1(41225,56375) 41227.5,56372.5 C49.2@41425,56372.5
  BottomLayer w7: v1(39499.46,55025.54) 39500,55026.08 39500,55100 39940,55540 40515,55540 40645,55670 40645,56195 40825,56375 v1(41225,56375)
PA4: CN12.11 R63.2 U1.29 | length 2869.9
  TopLayer w7: CN12.11@38950,55200 39000,55250 39150,55250 39722.83,54677.17 U1.29@39995.87,54677.17 ; v1(39775,55900) R63.2@39815,55900
  BottomLayer w7: CN12.11@38950,55200 39000,55250 39075,55250 39100,55275 39100,55800 39325,56025 39600,56025 39725,55900 v1(39775,55900)
PA5: CN12.12 CN15.5 U1.30 U3.6 | length 3360.5
  TopLayer w7: CN12.12@39050,55200 39175,55200 39717.52,54657.48 U1.30@39995.87,54657.48 ; CN15.5@39343.7,56171.65 39343.7,56006.3 v1(39350,56000) ; U3.6@40250,55850 v1(40300,55850)
  BottomLayer w7: CN12.12@39050,55200 39075,55200 39112,55237 39112,55787 39325,56000 39600,56000 39725,55875 40275,55875 v1(40300,55850)
PA6: CN12.13 R65.1 R82.1 U1.31 | length 2844.1
  TopLayer w7: CN12.13@38950,55100 39000,55150 39200,55150 39712.2,54637.8 U1.31@39995.87,54637.8 ; v1(39250,55900) R82.1@39250,55960 ; v1(39650,55925) 39675,55900 R65.1@39725,55900
  BottomLayer w7: CN12.13@38950,55100 39000,55150 39075,55150 39125,55200 39125,55775 39325,55975 39600,55975 v1(39650,55925)
PA7: CN12.14 CN15.3 U1.32 U3.5 | length 3435
  TopLayer w7: CN12.14@39050,55100 39225,55100 39706.89,54618.11 U1.32@39995.87,54618.11 ; v1(39425,55950) 39430.31,55955.31 CN15.3@39430.31,56171.65 ; U3.5@40250,55800 v1(40300,55800)
  BottomLayer w7: CN12.14@39050,55100 39075,55100 39137,55162 39137,55762 39325,55950 39595,55950 39720,55825 40275,55825 v1(40300,55800)
PA8: CN13.45 R67.1 TP8.1 U1.67 | length 3865.9
  TopLayer w7: U1.67@40378.74,54195.87 40378.74,53946.26 40675,53650 41425,53650 41575,53500 CN13.45@41650,53500 ; TP8.1@41500,53225 41500,53150 41715,52935 41715,51865 41572.5,51722.5 R67.1@41572.5,51550
  BottomLayer w7: TP8.1@41500,53225 41500,53350 CN13.45@41650,53500
PA9: CN13.44 U1.68 U10.11 | length 2688.9
  TopLayer w7: U10.11@39701.97,53497.05 39847.05,53497.05 v1(40250,53900) ; U1.68@40398.43,54195.87 40398.43,53951.57 40512.21,53837.79 ; 40512.5,53837.5 40675,53675 41450,53675 41575,53550 41700,53550 CN13.44@41750,53600
  BottomLayer w7: v1(40250,53900) 40350,54000 v1(40400,54000)
PA10: CN13.43 R70.2 U1.69 | length 2277.1
  TopLayer w7: R70.2@39915,53650 39975,53650 v1(40250,53925) ; U1.69@40418.11,54195.87 40418.11,53956.89 40675,53700 41475,53700 41575,53600 CN13.43@41650,53600
  BottomLayer w7: v1(40250,53925) 40350,54025 v1(40418.11,54025)
PA11: CN13.42 R9.2 U1.70 | length 4004.1
  TopLayer w7: R9.2@39025,52627.5 39025,52700 39140,52815 39715,52815 39763,52863 39763,53338 v1(40300,53875) ; U1.70@40437.8,54195.87 40437.8,53962.2 40675,53725 41500,53725 41575,53650 41700,53650 CN13.42@41750,53700
  BottomLayer w7: v1(40300,53875) 40350,53925 v1(40475,53925)
PA12: CN13.41 R10.2 U1.71 | length 3789.8
  TopLayer w7: R10.2@39100,52627.5 39100,52700 39200,52800 39725,52800 39775,52850 39775,53325 v1(40300,53850) ; U1.71@40457.48,54195.87 40457.48,53967.52 40675,53750 41525,53750 41575,53700 CN13.41@41650,53700
  BottomLayer w7: v1(40300,53850) 40350,53900 40475,53900 v1(40500,53925)
PA13: CN7.7 CN9.2 CN10.2 CN13.40 R101.1 U1.72 | length 4340.9
  TopLayer w7: U1.72@40477.17,54195.87 40477.17,53972.83 40675,53775 41550,53775 41575,53750 41700,53750 CN13.40@41750,53800 41795,53800 41875,53880 41875,54675 42075,54875 42150,54875 CN9.2@42200,54925 ; R101.1@42202.5,53300 CN7.7@42375,53300
  BottomLayer w7: CN13.40@41750,53800 41925,53800 42288,53437 42288,53387 CN7.7@42375,53300 ; CN9.2@42200,54925 42250,54975 42425,54975 CN10.2@42475,54925
PA14: CN7.9 CN9.4 CN10.4 CN13.37 R102.2 U1.76 | length 4031.3
  TopLayer w7: U1.76@40604.13,54263.78 41161.22,54263.78 41525,53900 CN13.37@41650,53900 ; v1(41924.67,53825.33) 41925,53825.67 41925,54625 42075,54775 42150,54775 CN9.4@42200,54825 ; R102.2@42202.5,53200 CN7.9@42375,53200
  BottomLayer w7: CN13.37@41650,53900 41700,53850 41900,53850 42300,53450 42300,53400 42350,53350 42400,53350 42425,53325 42425,53250 CN7.9@42375,53200 ; CN9.4@42200,54825 42250,54875 42425,54875 CN10.4@42475,54825
PA15: CN7.5 CN9.8 CN10.8 CN13.38 R104.1 U1.77 | length 3588.2
  TopLayer w7: U1.77@40604.13,54283.46 41166.54,54283.46 41500,53950 41700,53950 CN13.38@41750,53900 ; v1(41974.79,53800.21) 41975,53800 41975,54475 42075,54575 42150,54575 CN9.8@42200,54625 ; R104.1@42202.5,53400 CN7.5@42375,53400
  BottomLayer w7: CN13.38@41750,53900 41875,53900 CN7.5@42375,53400 ; CN9.8@42200,54625 42250,54675 42425,54675 CN10.8@42475,54625